# Altium PCB Filter board test.PcbDoc
Units mm, origin at the board's own origin, x right, y up, seen from the top; angles counter-clockwise.
Board outline 84 x 75 mm, 2 copper layers (Top Layer, Bottom Layer), stack 0.871 mm thick; 19 components, 11 nets, 76 pads, 572 vias.
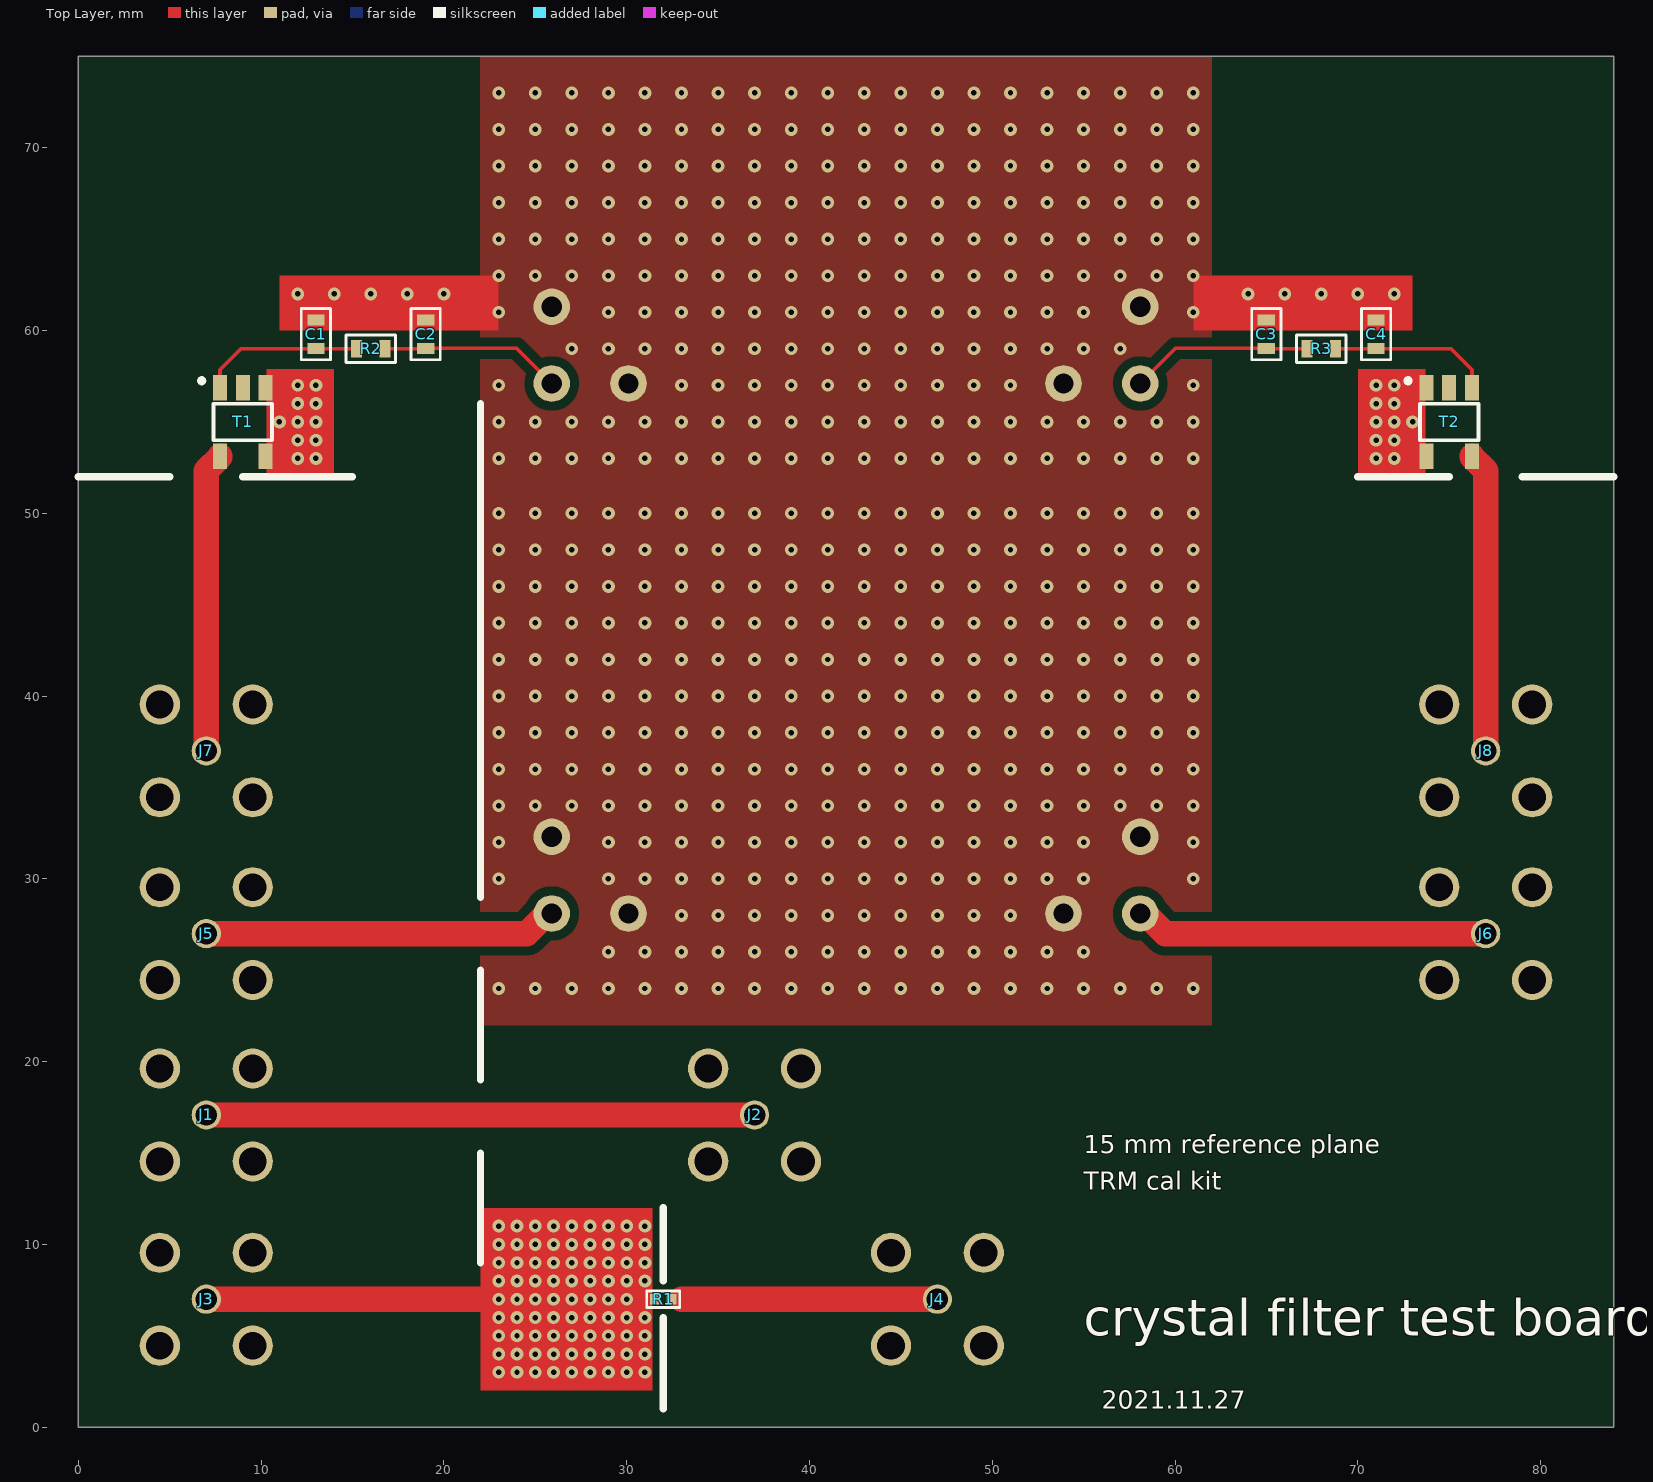
[diagram p0: Top Layer view]
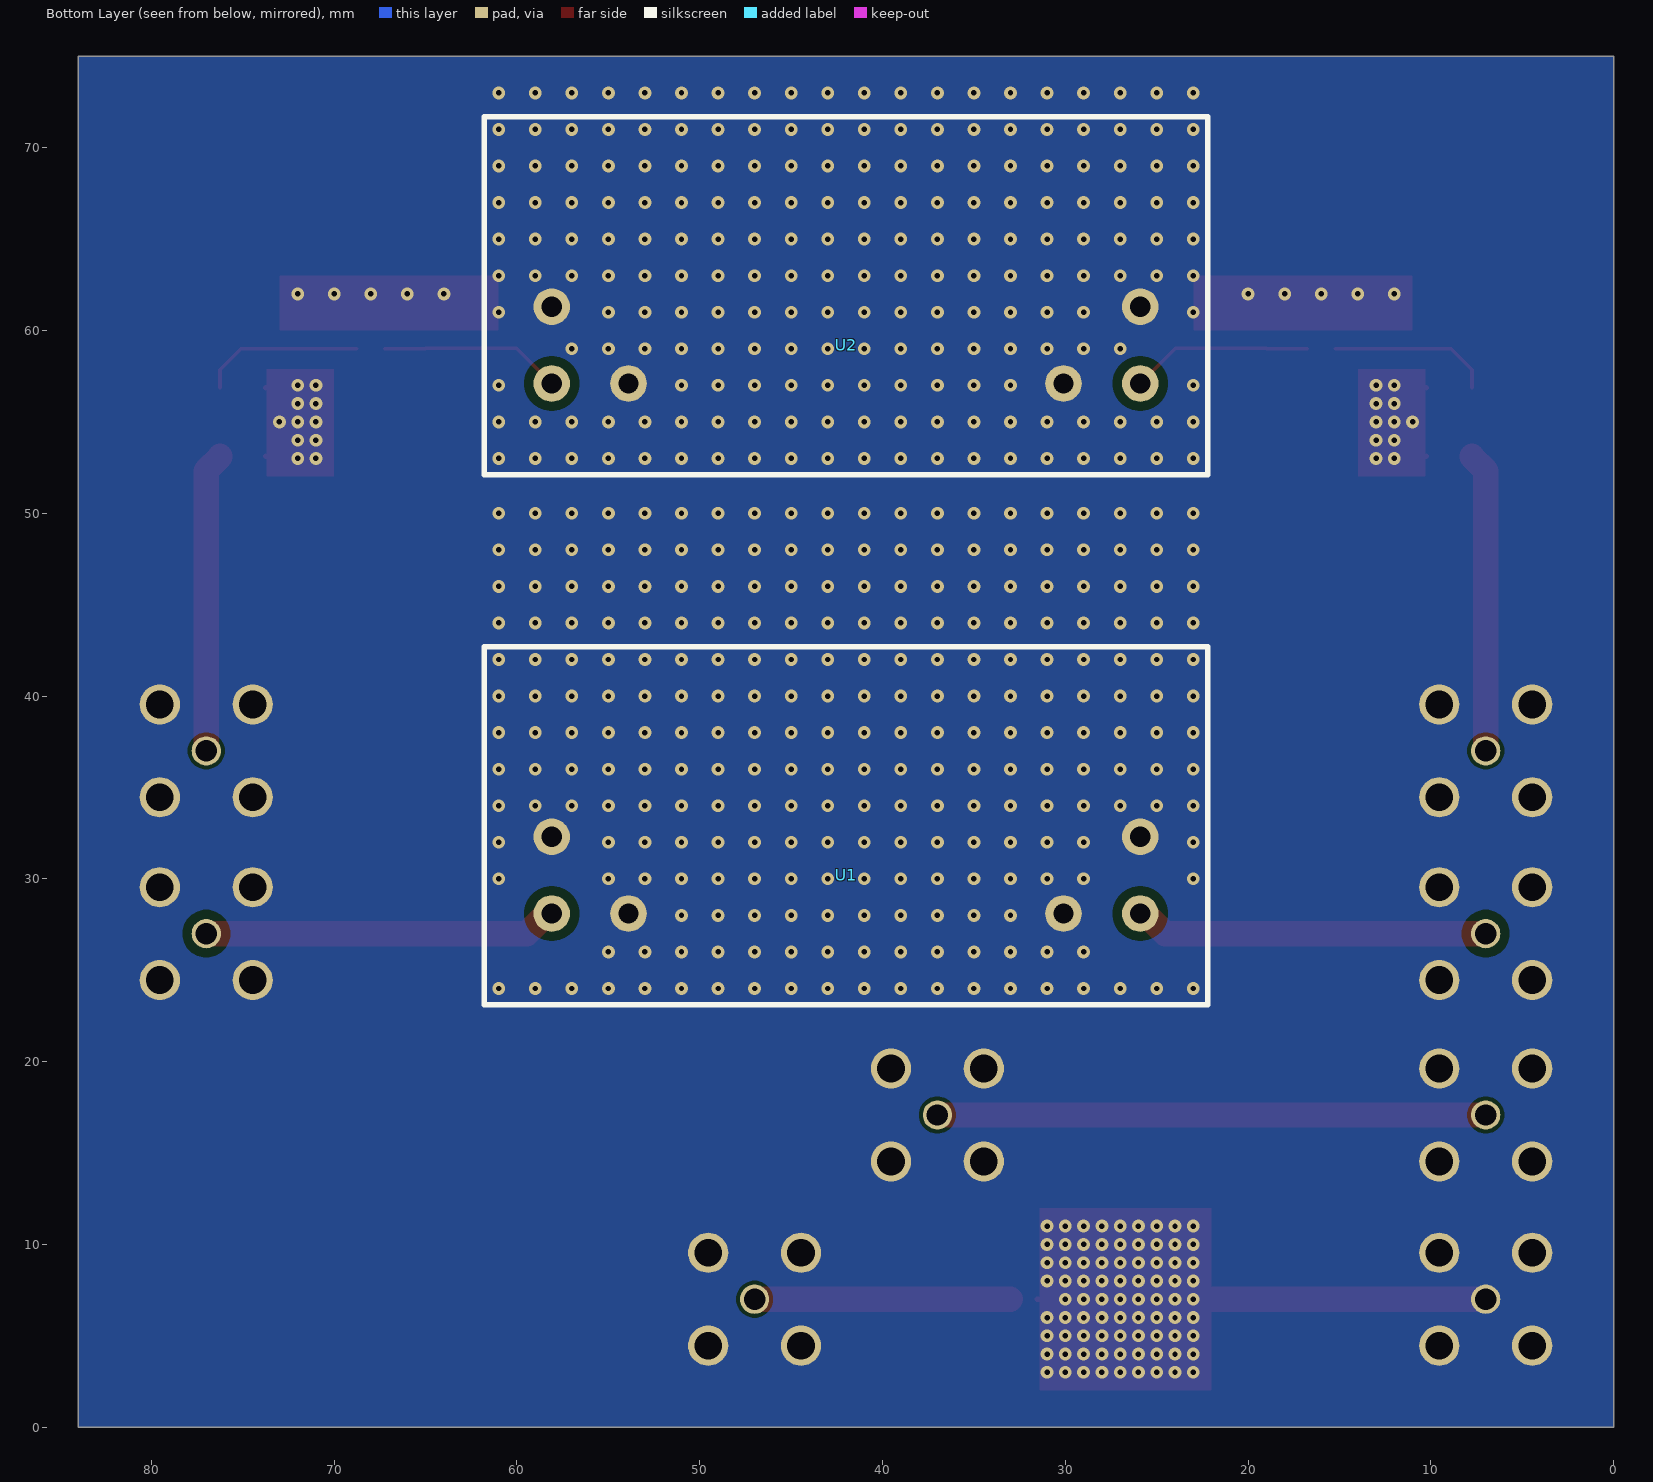
[diagram p1: Bottom Layer view, seen from below]
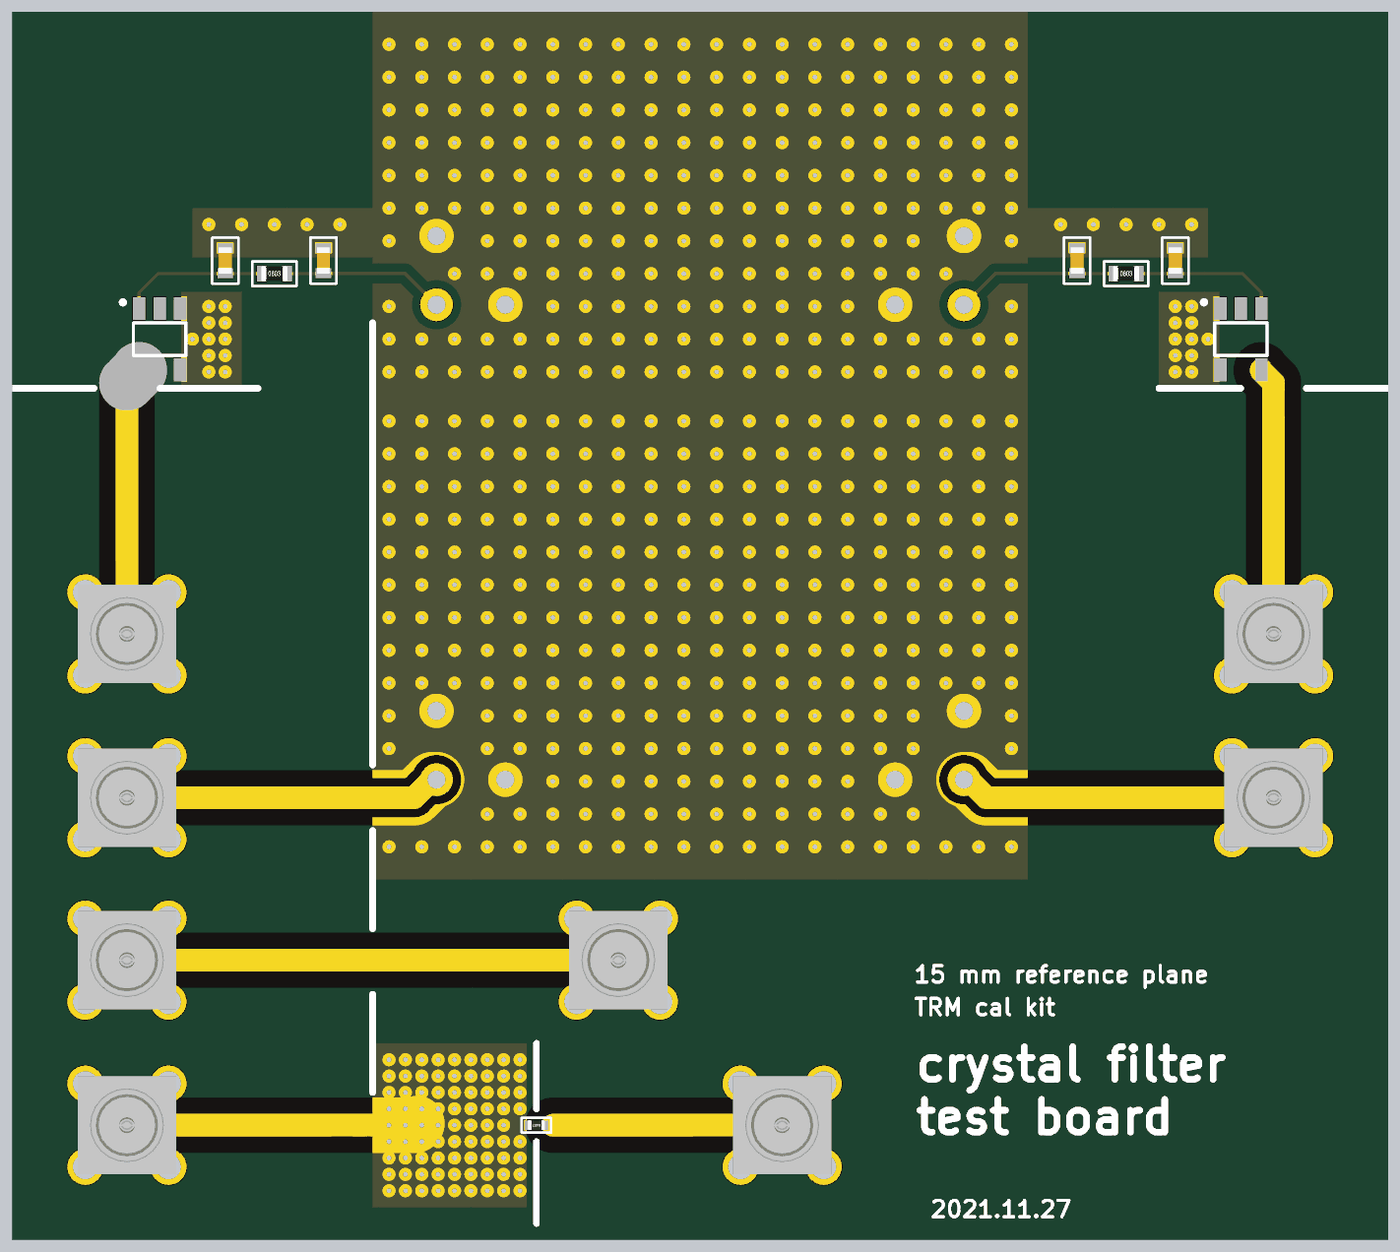
[diagram p2: 3D render of the assembled board from above, using the file's embedded part models]

## Layer stack, top to bottom
Top Solder: solder mask 0.0102, Solder Resist, Dk 3.5
Top Layer: signal copper 0.0356
Dielectric 1: dielectric 0.8, FR-4, Dk 4.8
Bottom Layer: signal copper 0.0356
Bottom Solder: solder mask 0.0102, Solder Resist, Dk 3.5

## Board outline
0,0 0,75 84,75 84,27 84,0

## Design rules (kind name [scope] priority, off if disabled: settings)
Clearance Clearance_1 [InNet('GND') vs InNetClass('distanc')] p1: gap=0.5 ignorepadtopadclearanceinfootprint=FALSE
Clearance [All] p2: gap=0.127 ignorepadtopadclearanceinfootprint=FALSE except(0: Arc-Hole Track-Hole SMDPad-Hole THPad-Hole Via-Hole Fill-Hole Poly-Hole Region-Hole Text-Hole; 0.152: Arc-Text Track-Text SMDPad-Text THPad-Text Via-Text Fill-Text Poly-Text Region-Text Text-Text; 0.2: Arc-SMDPad Arc-THPad Track-SMDPad Track-THPad SMDPad-THPad SMDPad-Via THPad-THPad THPad-Fill THPad-Poly THPad-Region; 0.254: Arc-Via Track-Via Via-Via Via-Fill Via-Poly Via-Region; 0.5: THPad-Via)
ComponentClearance [All] p1: gap=0.15 collisioncheckmode=3 verticalgap=0.254 showdistances=FALSE
HoleSize [All] p1: absolutevalues=TRUE maxlimit=6.3 minlimit=0.2 maxpercent=80.000 minpercent=20.000
HoleToHoleClearance [All] p1: gap=0.5 allowstackedmicrovias=TRUE
MinimumAnnularRing [All] p1: minimumring=0.13
MinimumSolderMaskSliver [All] p1: minsoldermaskwidth=0.2
PlaneConnect [All] p1: planeconnectstyle=Direct reliefexpansion=0.508 reliefentries=4 reliefconductorwidth=0.254 reliefairgap=0.254
PolygonConnect "Footprint connection" [All vs HasFootprint('DCC6C') or HasFootprint('32K243-40ML5 ro4003c') or HasFootprint('CONUFL001-SMD-T')] p1: connectstyle=Direct reliefconductorwidth=0.254 reliefentries=4 polygonreliefangle="90 Angle" airgapwidth=0.254
PolygonConnect "Via connection" [All vs IsVia or IsShieldingVia or IsStitchingVia] p2: connectstyle=Direct reliefconductorwidth=0.254 reliefentries=4 polygonreliefangle="90 Angle" airgapwidth=0.254
PolygonConnect [All] p3: connectstyle=Direct reliefconductorwidth=0.3 reliefentries=4 polygonreliefangle="90 Angle" airgapwidth=0.15
RoutingCorners [All] p1: cornerstyle=45-Degree minsetback=1 maxsetback=2.54
RoutingVias [All] p1: holewidth=0.3 width=0.6 viastyle="Through Hole" minholewidth=0.3 minwidth=0.6 maxholewidth=6 maxwidth=7
SilkToSilkClearance [All] p1: silktosilkclearance=0
SilkToSolderMaskClearance [IsPad] p1: minsilkscreentomaskgap=0.15 clearancetoexposedcopper=TRUE
SolderMaskExpansion [All] p1: expansion=0.05 istentingtop=FALSE
UnRoutedNet [All] p1: checkbadconnections=TRUE
Width "50 ohm" [InNetClass('50 ohm')] p1: maxlimit=1.39 minlimit=1.38 preferedwidth=1.387 impedanceprofiledriven=TRUE impedanceprofileid={E430B1E5-7CBE-4BDD-AEDA-844C6A17B239} impedanceprofilevalue=50.000000 minimp=50.000000 maximp=50.000000 favimp=50.000000
Width [All] p2: maxlimit=3 minlimit=0.127 preferedwidth=0.2
21 further rules are at their usual default settings.

## Classes and differential pairs
net class distanc: NetC2_2 NetC3_2 NetJ5_1 NetJ6_1
net class "50 ohm": MATCH NetJ5_1 NetJ6_1 NetJ7_1 NetJ8_1 THRU
component class Filters: C1 C2 C3 C4 J5 J6 J7 J8 R2 R3 T1 T2 U1 U2
component class Calkit: J1 J2 J3 J4 R1

## Components (designator, comment, footprint, x,y, rotation, side; value= is the part's Value field where it differs from the comment)
C1 "22p, 50V, C0G" SMD0603 13,59.8 r270 top
C2 "22p, 50V, C0G" SMD0603 19,59.8 r270 top
C3 "22p, 50V, C0G" SMD0603 65,59.8 r270 top
C4 "22p, 50V, C0G" SMD0603 71,59.8 r270 top
J1 "MCX 73366-0061" 73366-0061 7,17.08 r0 top
J2 "MCX 73366-0061" 73366-0061 37,17.08 r0 top
J3 "MCX 73366-0061" 73366-0061 7,7 r0 top
J4 "MCX 73366-0061" 73366-0061 47,7 r180 top
J5 "MCX 73366-0061" 73366-0061 7,27 r0 top
J6 "MCX 73366-0061" 73366-0061 77,27 r0 top
J7 "MCX 73366-0061" 73366-0061 7,37 r0 top
J8 "MCX 73366-0061" 73366-0061 77,37 r0 top
R1 "49R9, 0.1%" "SMD0402 - R" 32,7 r180 top
R2 "100R, 1%" "SMD0603 - R" 16,59 r0 top
R3 "100R, 1%" "SMD0603 - R" 68,59 r0 top
T1 "TC16-161T+" MABA-007159-000000 9,55 r0 top
T2 "TC16-161T+" MABA-007159-000000 75,55 r0 top
U1 "F-10M7-K6" F-10M7-K6 42,28 r180 bottom
U2 "F-10M7-K6" F-10M7-K6 42,57 r180 bottom

## Footprints (in the part's own frame and the unit in brackets; to place one, negate y for a bottom-side part, rotate by r counter-clockwise, add the part's x,y. Pads: shape width x height; smd on the part's side, far side on the other; paste and mask are expansions set on the pad)
73366-0061 [mm]
  round 1.6 hole 1.17: 1(0,0)
  round 2.2 hole 1.52: 2(-2.54,-2.54) 2(-2.54,2.54) 2(2.54,-2.54) 2(2.54,2.54)
  body extent -3,-3 3,3, height 5.5
F-10M7-K6 [mm]
  round 2 hole 1.1 mask+0.05: 1(-16.1,0.1) 2(-16.1,4.3) 3(-11.9,0.1) 4(11.9,0.1) 5(16.1,4.3) 6(16.1,0.1)
  silkscreen extent -19.8,-4.9 19.8,14.7, body extent -19,-4.1 19,13.9, height 12
MABA-007159-000000 [mm] "E-Series RF 1:1 Transmission Line Transformer  4.5 - 3000 MHz"
  rect 0.76x1.4 smd: 1(-1.25,1.87) 2(0,1.87) 3(1.25,1.87) 4(1.25,-1.87) 5(-1.25,-1.87)
  silkscreen extent -2.37,-1 1.6,2.37, body extent -1.59,-1.4 1.59,1.39, height 2.6
"SMD0402 - R" [mm] "2-Leads, Body 1,00x0,50mm(0403), IPC Medium Density"
  rect 0.55x0.55 smd: 1(-0.45,0) 2(0.45,0)
  silkscreen extent -0.9,-0.45 0.9,0.45, body extent -0.52,-0.3 0.52,0.3, height 0.34
SMD0603 [mm] "2-Leads, Body 1,60x0,85mm(0603), IPC Medium Density"
  rect 0.6x0.95 smd: 1(-0.775,0) 2(0.775,0)
  silkscreen extent -1.4,-0.8 1.4,0.8, body extent -0.8,-0.4 0.8,0.4, height 0.7
"SMD0603 - R" [mm] "2-Leads, Body 1,60x0,85mm(0603), IPC Medium Density"
  rect 0.6x0.95 smd: 1(-0.775,0) 2(0.775,0)
  silkscreen extent -1.35,-0.75 1.35,0.75, body extent -0.8,-0.45 0.8,0.45, height 0.5

## Part data
C1 C2 C3 C4: library part MC0603N220J500CT, "MULTICOMP - MC0603N220J500CT - CAP, MLCC, C0G/NP0, 22PF, 50V, 0603", Capacitance=22p, Manufacturer=MULTICOMP, Supplier Part Number 1=1759057, ComponentLink1Description=http://www.farnell.com/datasheets/1901289.pdf, ComponentLink1URL=http://www.farnell.com/datasheets/1901289.pdf, Manufacturer Part Number=MC0603N220J500CT, Pricing 1="10=0.0077, 100=0.0065, 500=0.0052, 1000=0.0044, 2000=0.0038 (GBP)", RoHS=YES, Stock 1=184439, Supplier 1=Farnell, Supplier 2=Newark, Supplier Part Number 2=94W8766
J1 J2 J3 J4 J5 J6 J7 J8: library part 73366-0061, "CONN MCX JACK STR 50 OHM PCB", Dielectric Material="Polytetrafluoroethylene (PTFE)", Housing Color=Gold, Manufacturer="Molex, LLC", Manufacturer Part Number=0733660061, Operating Temperature="-55°C ~ 155°C", Supplier Part Number 1=538-73366-0061, Body Finish=Gold, Body Material=Brass, Cable Group=-, Category="Connectors, Interconnects", Center Contact Material="Beryllium Copper", Center Contact Plating=Gold, ComponentLink1Description=https://www.molex.com/pdm_docs/sd/733660061_sd.pdf, ComponentLink1URL=https://www.molex.com/pdm_docs/sd/733660061_sd.pdf, Connector Style=MCX, Connector Type="Jack, Female Socket", Contact Termination=Solder, Fastening Type=Snap-On, Features=-, Impedance="50 Ohm", Includes=-, Ingress Protection=-, Insertion Loss=-, Mating Cycles=500, Mounting Feature=-, Mounting Type="Through Hole", Packaging=Tray, Part Status=Active, Pricing 1="1=1.95, 10=1.765, 25=1.6572, 50=1.5854, 100=1.5133, 250=1.36916, 500=1.26106, 1000=1.0809, 2500=1.00884 (USD)", RoHS="RoHS Compliant", Shield Termination=Solder, Stock 1=39394, Supplier 1=Mouser, Supplier 2=Digi-Key, Supplier 3=Farnell, Supplier Part Number 2=WM5541-ND, Supplier Part Number 3=1909245
R1: library part AT0402BRD0749R9L, "Thin Film Resistors - SMD 49.9 Ohms 0.1% Tol. AEC-Q200", Case Code - in=0402, Case Code - mm=1005, Manufacturer=Yageo, Maximum Operating Temperature="+ 125 C", Minimum Operating Temperature="- 55 C", Operating Temperature Range="- 55 C to + 125 C", Package / Case="0402 (1005 metric)", Power Rating="62.5 mW (1/16 W)", Resistance="49.9 Ohms", Supplier Part Number 1=603-AT0402BRD0749R9L, Temperature Coefficient="25 PPM / C", Tolerance="0.1 %", Voltage Rating="50 V", Brand=Yageo, Category="Thin Film Resistors - SMD", CNHTS=8533211000, ComponentLink1Description=http://www.mouser.com/datasheet/2/447/PYu-AT_51_RoHS_L_5-1222714.pdf, ComponentLink1URL=http://www.mouser.com/datasheet/2/447/PYu-AT_51_RoHS_L_5-1222714.pdf, Diameter=-, Features=-, Height="0.3 mm", HTS Code=8533210030, Length="1 mm", Manufacturer Part Number=AT0402BRD0749R9L, Minimum Order Quantity=1, Mounting Style="PCB Mount", MXHTS=85332101, Packaging="Cut Tape", Pricing 1="1=0.594, 10=0.346, 100=0.139, 1000=0.106, 2500=0.081, 10000=0.079, 20000=0.077 (EUR)", Product="Thin Film Resistors SMD", Product Type="Thin Film Resistors", Qualification=AEC-Q200, Reeling=True, RoHS="RoHS Compliant", RoHS - Mouser=Y, Series=AT, Standard Pack Qty=10000, Stock 1=9662, Subcategory=Resistors, Supplier 1=Mouser, TARIC=8533210000, Termination Style=SMD/SMT, Type="High Precision High Stability Chip Resistors", Width="0.5 mm"
R2 R3: library part MCWR06X1000FTL, "MULTICOMP - MCWR06X1000FTL - RES, THICK FILM, 100R, 1%, 0.1W, 0603", Manufacturer=MULTICOMP, Power Rating=100, Resistance=100R, Resistance Tolerance="± 1%", Resistor Case Style="0603 [1608 Metric]", Resistor Element Material="Thick Film", Supplier Part Number 1=2447227, Temperature Coefficient="± 100", Voltage Rating=50, Automotive Qualification Standard=-, ComponentLink1Description=http://www.farnell.com/datasheets/1849611.pdf, ComponentLink1URL=http://www.farnell.com/datasheets/1849611.pdf, Manufacturer Part Number=MCWR06X1000FTL, Packaging="Cut Tape", Pricing 1="10=0.0032, 100=0.002, 500=0.0013, 1000=0.0011, 2500=0.0009 (GBP)", Product Range="MCWR Series", RoHS=Y-EX, Stock 1=246691, Supplier 1=Farnell, SVHC="No SVHC (07-Jul-2017)<!--FANDB--><div class=\"features-and-benefits-container\"><div class=\"features-and-benefits-desc-container\"><span class=\"features-and-benefits-container-desc\">SMD Chip Resistor, Thick Film, 100 ohm, 50 V, 0603 [1608 Metric], 100 mW, ± 1%, MCWR Series</span></div><div class=\"features-and-benefits-description\"><span class=\"features-benefits-value\">The MCWR06X1000FTL is a thick film Chip Resistor with 0603 chip format. The resistor is constructed in a high grade ceramic body (aluminium oxide). Internal metal electrodes are added at each end and connected by a resistive paste that is applied to the top surface of the substrate. The composition of the paste is adjusted to give the approximate resistance required and the value is trimmed to within tolerance by laser cutting of this resistive layer.</span></div><div class=\"features-and-benefits-list\"><ul class=\"features-and-benefits-list-list\"><li class=\"features-and-benefits-list-item\">High reliability and stability</li><li class=\"features-and-benefits-list-item\">Reduced size of final equipment</li><li class=\"features-and-benefits-list-item\">Lower assembly costs</li><li class=\"features-and-benefits-list-item\">Higher component and equipment reliability</li></ul></div><div class=\"features-and-benefits-applications\"><ul class=\"features-and-benefits-value\"><li class=\"features-and-benefits-list-item\">Consumer Electronics</li><li class=\"features-and-benefits-list-item\">Computers & Computer Peripherals</li><li class=\"features-and-benefits-list-item\">Communications & Networking</li></ul></div></div>"
T1 T2: "RF Transformer, 50 ohm, 16.0: 1, 0.60-160 MHz, SMT", Manufacturer=Mini-Circuits, Supplier Part Number 1=139-TC16-161T, Manufacturer Part Number=TC16-161T+, Pricing 1="1=3.45000, 10=2.88000, 50=2.88000, 100=2.36000, 250=1.96000, 500=1.84000, 1000=1.73000, 2000=1.64000, 4000=1.52000, 10000=1.49000 (USD)", RoHS=Yes, RoHS Compliant=Yes, Stock 1=1094, Supplier 1=Mouser, Supplier 2=Digi-Key, Supplier Part Number 2=3157-TC16-161T+CT-ND
U1 U2: "10.7 MHz crystal band-pass filter, 8 poles / - Bandwidth (-3dB): 12 KHz / - Selectivity: 90 dB / - Impedance: 900 Ω / - Dimensions: 38 x 18 mm, h 12 mm"

## Via types
v1: diameter 0.7, hole 0.3, Top Layer to Bottom Layer, 572 vias

## Nets (pads, with @x,y where several pads share a name; then routed paths per layer and width w, separated by ;. In a path a pad name is that pad's centre, name@x,y a point inside that pad or via, vN(x,y) a via of type N, cw(c..) or ccw(c..) an arc to the next point about the centre after c; other vN are vias at no path point)
GND: C1.1 C2.1 C3.1 C4.1 J1.2 J2.2 J3.1 J3.2 J4.2 J5.2 J6.2 J7.2 J8.2 R1.2 T1.3 T1.4 T2.1 T2.5 U1.2 U1.3 U1.4 U1.5 U2.2 U2.3 U2.4 U2.5 | length 26.4
  Top Layer w0.3: T1.4 10.48,53 v1(12,53) ; T1.3 10.48,57 v1(12,57) ; v1(30,7) R1.2 ; v1(72,53) 73.52,53 T2.5 ; v1(72,57) 73.52,57 T2.1
  Top Layer w1.387: J3.1 24.6,7 v1@24.7,7.1
  other v1: 23,3 24,3 25,3 26,3 27,3 28,3 29,3 30,3 31,3 23,4 24,4 25,4 26,4 27,4 28,4 29,4 30,4 31,4 23,5 24,5 25,5 26,5 27,5 28,5 29,5 30,5 31,5 23,6 24,6 25,6 26,6 27,6 28,6 29,6 30,6 31,6 23,7 24,7 25,7 26,7 27,7 28,7 29,7 23,8 24,8 25,8 26,8 27,8 28,8 29,8 30,8 31,8 23,9 24,9 25,9 26,9 27,9 28,9 29,9 30,9 31,9 23,10 24,10 25,10 26,10 27,10 28,10 29,10 30,10 31,10 23,11 24,11 25,11 26,11 27,11 28,11 29,11 30,11 31,11 23,24 25,24 27,24 29,24 31,24 33,24 35,24 37,24 39,24 41,24 43,24 45,24 47,24 49,24 51,24 53,24 55,24 57,24 59,24 61,24 29,26 31,26 33,26 35,26 37,26 39,26 41,26 43,26 45,26 47,26 49,26 51,26 53,26 55,26 33,28 35,28 37,28 39,28 41,28 43,28 45,28 47,28 49,28 51,28 23,30 29,30 31,30 33,30 35,30 37,30 39,30 41,30 43,30 45,30 47,30 49,30 51,30 53,30 55,30 61,30 23,32 29,32 31,32 33,32 35,32 37,32 39,32 41,32 43,32 45,32 47,32 49,32 51,32 53,32 55,32 61,32 23,34 25,34 27,34 29,34 31,34 33,34 35,34 37,34 39,34 41,34 43,34 45,34 47,34 49,34 51,34 53,34 55,34 57,34 59,34 61,34 23,36 25,36 27,36 29,36 31,36 33,36 35,36 37,36 39,36 41,36 43,36 45,36 47,36 49,36 51,36 53,36 55,36 57,36 59,36 61,36 23,38 25,38 27,38 29,38 31,38 33,38 35,38 37,38 39,38 41,38 43,38 45,38 47,38 49,38 51,38 53,38 55,38 57,38 59,38 61,38 23,40 25,40 27,40 29,40 31,40 33,40 35,40 37,40 39,40 41,40 43,40 45,40 47,40 49,40 51,40 53,40 55,40 57,40 59,40 61,40 23,42 25,42 27,42 29,42 31,42 33,42 35,42 37,42 39,42 41,42 43,42 45,42 47,42 49,42 51,42 53,42 55,42 57,42 59,42 61,42 23,44 25,44 27,44 29,44 31,44 33,44 35,44 37,44 39,44 41,44 43,44 45,44 47,44 49,44 51,44 53,44 55,44 57,44 59,44 61,44 23,46 25,46 27,46 29,46 31,46 33,46 35,46 37,46 39,46 41,46 43,46 45,46 47,46 49,46 51,46 53,46 55,46 57,46 59,46 61,46 23,48 25,48 27,48 29,48 31,48 33,48 35,48 37,48 39,48 41,48 43,48 45,48 47,48 49,48 51,48 53,48 55,48 57,48 59,48 61,48 23,50 25,50 27,50 29,50 31,50 33,50 35,50 37,50 39,50 41,50 43,50 45,50 47,50 49,50 51,50 53,50 55,50 57,50 59,50 61,50 13,53 23,53 25,53 27,53 29,53 31,53 33,53 35,53 37,53 39,53 41,53 43,53 45,53 47,53 49,53 51,53 53,53 55,53 57,53 59,53 61,53 71,53 12,54 13,54 71,54 72,54 11,55 12,55 13,55 23,55 25,55 27,55 29,55 31,55 33,55 35,55 37,55 39,55 41,55 43,55 45,55 47,55 49,55 51,55 53,55 55,55 57,55 59,55 61,55 71,55 72,55 73,55 12,56 13,56 71,56 72,56 13,57 23,57 33,57 35,57 37,57 39,57 41,57 43,57 45,57 47,57 49,57 51,57 61,57 71,57 27,59 29,59 31,59 33,59 35,59 37,59 39,59 41,59 43,59 45,59 47,59 49,59 51,59 53,59 55,59 57,59 23,61 29,61 31,61 33,61 35,61 37,61 39,61 41,61 43,61 45,61 47,61 49,61 51,61 53,61 55,61 61,61 12,62 14,62 16,62 18,62 20,62 64,62 66,62 68,62 70,62 72,62 23,63 25,63 27,63 29,63 31,63 33,63 35,63 37,63 39,63 41,63 43,63 45,63 47,63 49,63 51,63 53,63 55,63 57,63 59,63 61,63 23,65 25,65 27,65 29,65 31,65 33,65 35,65 37,65 39,65 41,65 43,65 45,65 47,65 49,65 51,65 53,65 55,65 57,65 59,65 61,65 23,67 25,67 27,67 29,67 31,67 33,67 35,67 37,67 39,67 41,67 43,67 45,67 47,67 49,67 51,67 53,67 55,67 57,67 59,67 61,67 23,69 25,69 27,69 29,69 31,69 33,69 35,69 37,69 39,69 41,69 43,69 45,69 47,69 49,69 51,69 53,69 55,69 57,69 59,69 61,69 23,71 25,71 27,71 29,71 31,71 33,71 35,71 37,71 39,71 41,71 43,71 45,71 47,71 49,71 51,71 53,71 55,71 57,71 59,71 61,71 23,73 25,73 27,73 29,73 31,73 33,73 35,73 37,73 39,73 41,73 43,73 45,73 47,73 49,73 51,73 53,73 55,73 57,73 59,73 61,73
MATCH: J4.1 R1.1 | length 14
  Top Layer w1.387: 33,7 J4.1
NetC1_2: C1.2 R2.1 T1.1 | length 8.9
  Top Layer w0.2: T1.1 7.75,57.85 8.9,59 13,59 R2.1
NetC2_2: C2.2 R2.2 U2.6 | length 9.9
  Top Layer w0.2: R2.2 18.975,59 C2.2 23.975,59.025 U2.6
NetC3_2: C3.2 R3.1 U2.1 | length 9.9
  Top Layer w0.2: U2.1 60.025,59.025 C3.2 65.025,59 R3.1
NetC4_2: C4.2 R3.2 T2.3 | length 8.9
  Top Layer w0.2: R3.2 71,59 75.1,59 76.25,57.85 T2.3
NetJ5_1: J5.1 U1.6 | length 19.4
  Top Layer w1.387: J5.1 24.538,27 25.638,28.1 U1.6
NetJ6_1: J6.1 U1.1 | length 19.4
  Top Layer w1.387: U1.1 58.362,28.1 59.462,27 J6.1
NetJ7_1: J7.1 T1.5 | length 16.4
  Top Layer w1.387: J7.1 7,52.33 7.75,53.08 T1.5
NetJ8_1: J8.1 T2.4 | length 16.4
  Top Layer w1.387: T2.4 76.25,53.08 77,52.33 J8.1
THRU: J1.1 J2.1 | length 30
  Top Layer w1.387: J1.1 J2.1
pads on no net: T1.2 T2.2

## Polygon pours and split planes (outlines as drawn)
GND on Bottom Layer "GND_L02_P000" (solid, remove dead copper, pour order 0): 0,0 0,75 84,75 84,0 75,0
GND on Top Layer "GND_L01_P001" (solid, remove dead copper, pour order 1): 22,22 22,75 62,75 62,22

## Other copper
Top Layer:
  region net GND: 73,63 61,63 61,60 73,60
  rectangle net GND: 11,60 23,63
  region net GND: 73.7,57.9 70,57.9 70,52 73.7,52
  rectangle net GND: 10.3,52 14,57.9
  rectangle net GND: 22,2 31.4,12

## Silkscreen, mask and mechanical layers (free items; w line width, h text height)
Top Overlay:
  lines w0.4: 0,52 5,52 ; 9,52 15,52 ; 22,9 22,15 ; 22,19 22,25 ; 22,29 22,56 ; 32,1 32,6 ; 32,8 32,12 ; 70,52 75,52 ; 79,52 84,52
  text "15 mm reference plane" at 55,15 h1
  text "TRM cal kit" at 55,13 h1
  text "crystal filter test board" at 55,5 h2
  text "2021.11.27" at 56,1 h1
Mechanical 1:
  lines w0.2: 0,0 84,0 84,27 84,75 44,75 0,75 0,0
Mechanical 2:
  lines w0.2: 0,52 23,52 ; 22,-7 22,69 ; 22,41 22,52 ; 61,52 92,52